# Altium PCB HandPCB.PcbDoc
Units mm, origin at the board's own origin, x right, y up, seen from the top; angles counter-clockwise.
Board outline 152.4 x 101.6 mm, 2 copper layers (Top Layer, Bottom Layer); 8 components, 21 nets, 82 pads, 4 vias.
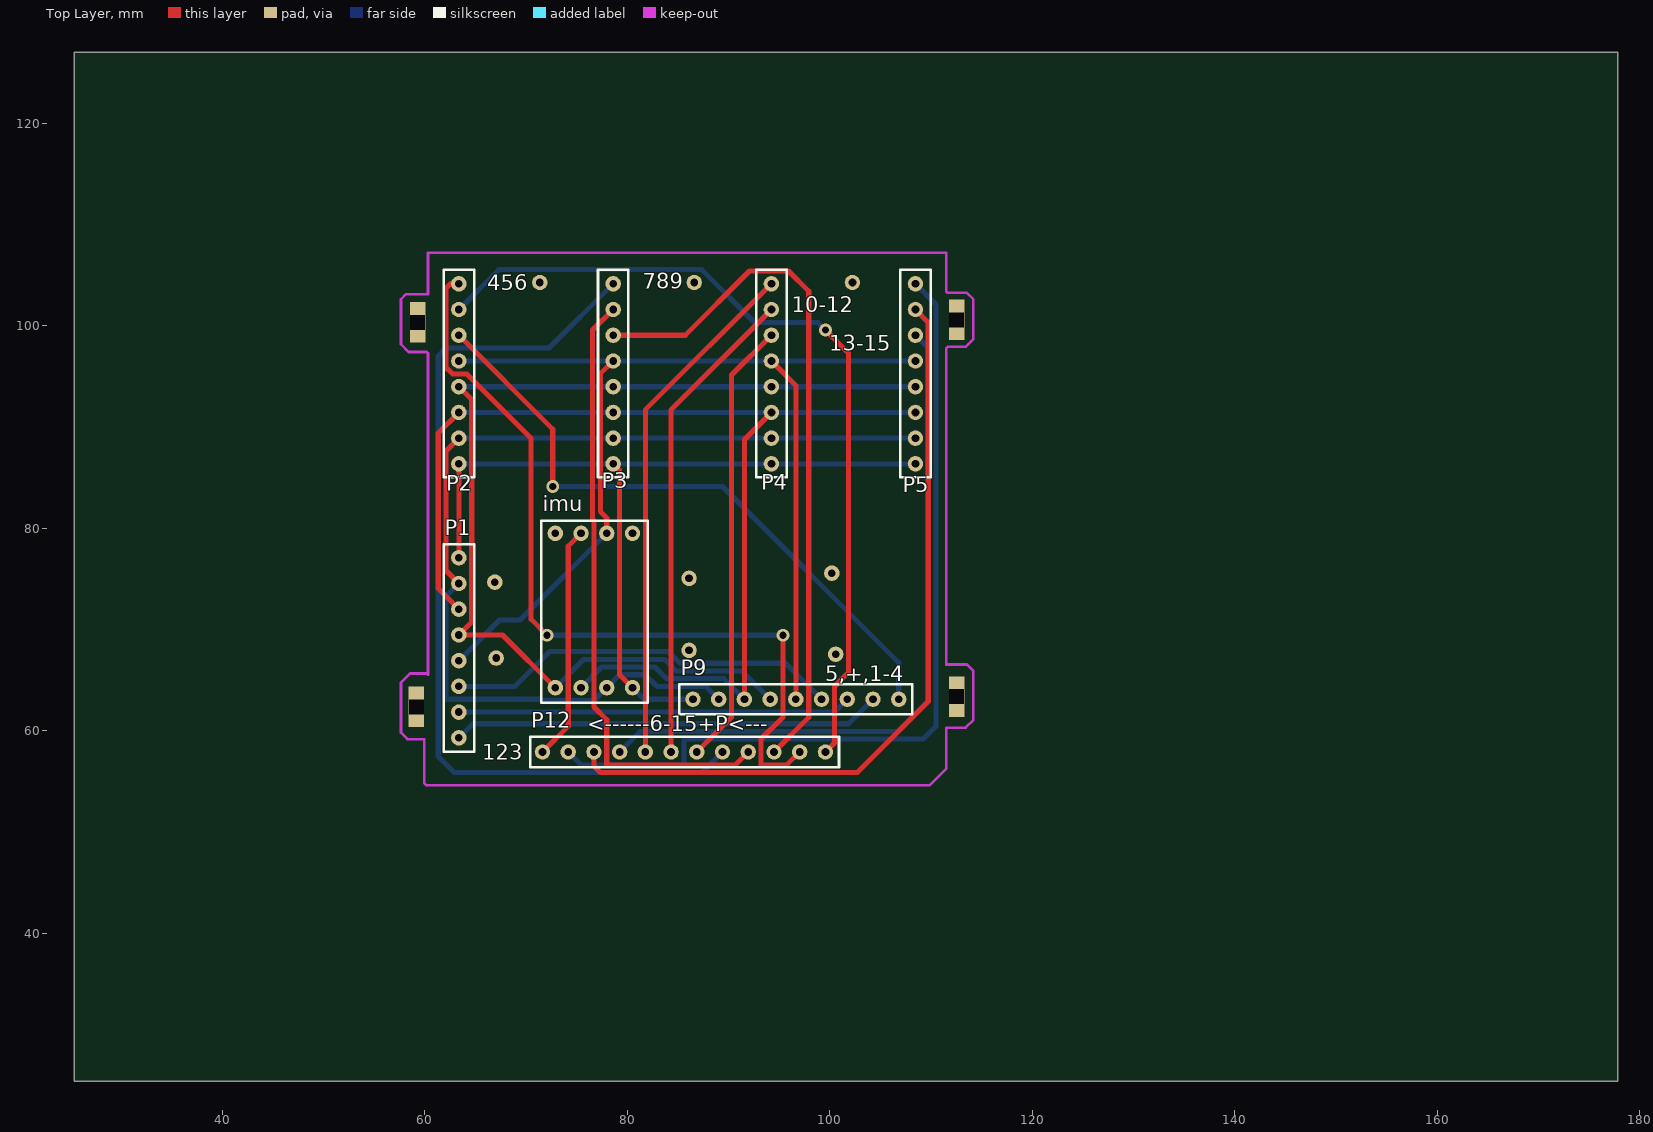
[diagram p0: Top Layer view]
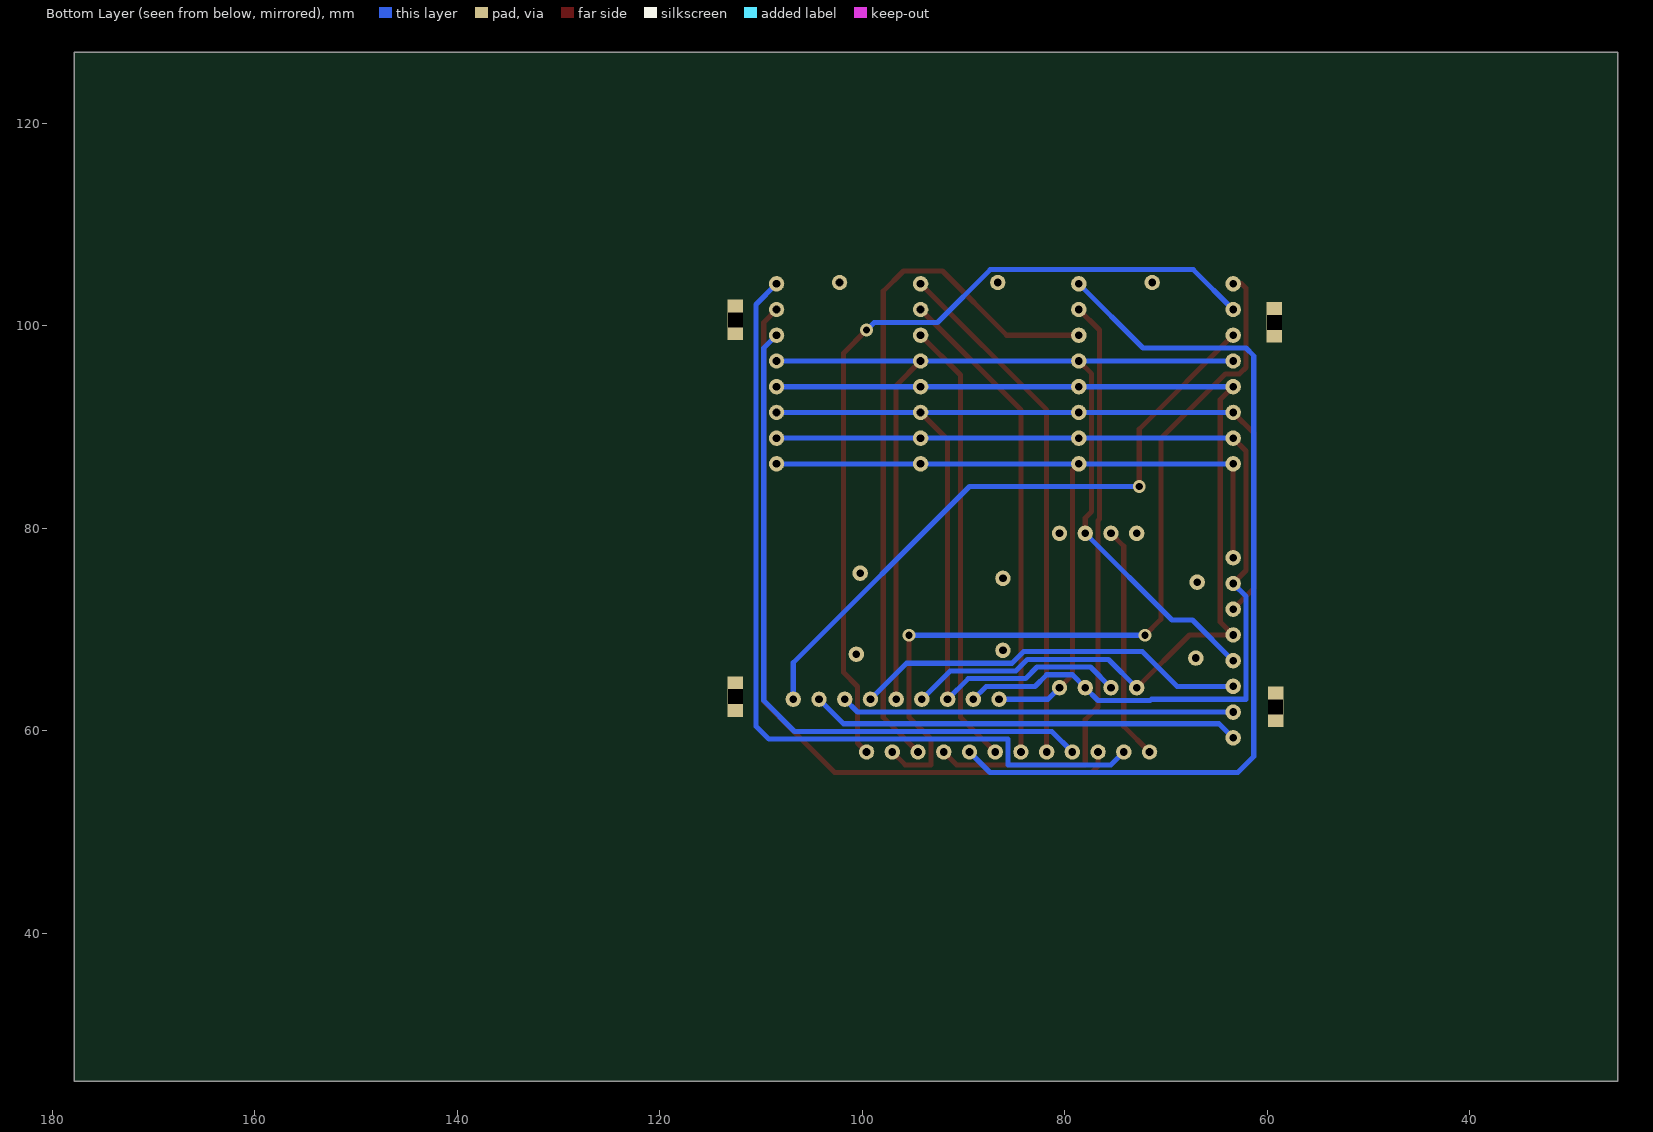
[diagram p1: Bottom Layer view, seen from below]

## Layer stack, top to bottom
Top Solder: solder mask 0.0102, Solder Resist, Dk 3.5
Top Layer: signal copper 0.0356
Dielectric 1: dielectric 0.32, FR-4, Dk 4.8
Bottom Layer: signal copper 0.0356
Bottom Solder: solder mask 0.0102, Solder Resist, Dk 3.5

## Board outline
25.4,25.4 177.8,25.4 177.8,127 25.4,127

## Design rules (kind name [scope] priority, off if disabled: settings)
Clearance [All] p1: gap=0.254 ignorepadtopadclearanceinfootprint=FALSE except(0: Arc-Hole Track-Hole SMDPad-Hole THPad-Hole Via-Hole Fill-Hole Poly-Hole Region-Hole Text-Hole)
PolygonConnect [All] p1: connectstyle=Relief reliefconductorwidth=0.254 reliefentries=4 polygonreliefangle="90 Angle" airgapwidth=0.254
RoutingVias [All] p1: holewidth=0.711 width=1.27 viastyle="Through Hole" minholewidth=0.711 minwidth=1.27 maxholewidth=0.711 maxwidth=1.27
SolderMaskExpansion [All] p1: expansion=0.102 istentingtop=FALSE
Width [All] p1: maxlimit=0.508 minlimit=0.508 preferedwidth=0.508 minimp=50.000000 maximp=50.000000 favimp=50.000000
30 further rules are at their usual default settings.

## Components (designator, comment, footprint, x,y, rotation, side; value= is the part's Value field where it differs from the comment)
imu "IMU" MPU9250 80.518,64.262 r180 top
P1 "8P" 8P 63.373,66.929 r270 top
P2 "8P" 8P 63.373,96.52 r90 top
P3 "8P" 8P 78.613,96.52 r90 top
P4 "8P" 8P 94.234,96.52 r90 top
P5 "8P" 8P 108.458,96.52 r90 top
P9 "9P" 9p 96.647,63.119 r0 top
P12 "12P" 12P 89.408,57.912 r180 top

## Footprints (in the part's own frame and the unit in brackets; to place one, negate y for a bottom-side part, rotate by r counter-clockwise, add the part's x,y. Pads: shape width x height; smd on the part's side, far side on the other; paste and mask are expansions set on the pad)
8P [mil]
  round 60 hole 30: 1(-400,0) 2(-300,0) 3(-200,0) 4(-100,0) 5(0,0) 6(100,0) 7(200,0) 8(300,0)
  silkscreen extent -453,-59 354,59
9p [mil]
  round 60 hole 30: 1(-400,0) 2(-300,0) 3(-200,0) 4(-100,0) 5(0,0) 6(100,0) 7(200,0) 8(300,0) 9(400,0)
  silkscreen extent -453,-59 453,59
12P [mil]
  round 60 hole 30: 1(-400,0) 2(-300,0) 3(-200,0) 4(-100,0) 5(0,0) 6(100,0) 7(200,0) 8(300,0) 9(400,0) 10(500,0) 11(600,0) 12(700,0)
  silkscreen extent -453,-59 748,59
MPU9250 [mil]
  round 60 hole 30: 1(0,0) 2(100,0) 3(200,0) 4(300,0) 5(0,-600) 6(100,-600) 7(200,-600) 8(300,-600)
  silkscreen extent -59,-650 354,59

## Free pads (board coordinates)
  round 1.524 hole 0.762: 2(71.374,104.267) 3(86.614,104.267) 4(102.235,104.267) 6(86.106,75.057) 7(66.929,74.676) 8(67.056,67.183) 9(100.584,67.564) 10(100.203,75.565) 11(86.106,67.945)
  rect 1.524x4 hole 1.424 square: 12(59.182,62.357) 12(59.309,100.33) 12(112.522,63.373) 12(112.522,100.584)

## Via types
v1: diameter 1.27, hole 0.711, Top Layer to Bottom Layer, 4 vias

## Nets (pads, with @x,y where several pads share a name; then routed paths per layer and width w, separated by ;. In a path a pad name is that pad's centre, name@x,y a point inside that pad or via, vN(x,y) a via of type N, cw(c..) or ccw(c..) an arc to the next point about the centre after c; other vN are vias at no path point)
Netimu_1: imu.1 P1.1 P2.1 P3.1 P4.1 P5.1 P9.1 | length 83.7
  Top Layer w0.508: P1.1 P2.1 ; P3.1 79.248,85.725 79.248,65.532 imu.1
  Bottom Layer w0.508: P2.1 P3.1 P4.1 P5.1 ; imu.1 81.661,63.119 P9.1
Netimu_2: imu.2 P1.2 P2.2 P3.2 P4.2 P5.2 P9.2 | length 101.5
  Top Layer w0.508: P1.2 62.103,75.819 62.103,87.63 P2.2
  Bottom Layer w0.508: P1.2 62.103,73.279 62.103,63.119 71.45,63.119 71.577,62.992 76.708,62.992 imu.2 79.248,65.532 81.788,65.532 82.931,64.389 87.757,64.389 P9.2 ; P2.2 P3.2 P4.2 P5.2
Netimu_3: imu.3 P1.3 P2.3 P3.3 P4.3 P5.3 P9.3 | length 113.9
  Top Layer w0.508: P1.3 61.341,74.041 61.341,89.408 P2.3 ; P9.3 91.567,88.773 P4.3
  Bottom Layer w0.508: P2.3 P3.3 P4.3 P5.3 ; imu.3 77.47,66.294 82.73,66.294 83.873,65.151 89.535,65.151 P9.3
Netimu_4: imu.4 P1.4 P2.4 P3.4 P4.4 P5.4 P9.4 | length 106.3
  Top Layer w0.508: P2.4 64.643,92.71 64.643,70.739 P1.4 67.691,69.469 imu.4
  Bottom Layer w0.508: P2.4 P3.4 P4.4 P5.4 ; imu.4 75.692,67.056 83.693,67.056 84.836,65.913 91.313,65.913 P9.4
Netimu_6: imu.6 P1.5 P2.5 P3.5 P4.5 P5.5 P9.5 | length 117.1
  Top Layer w0.508: imu.6 77.978,81.026 77.343,81.661 77.343,95.25 P3.5 ; P4.5 96.647,94.107 P9.5
  Bottom Layer w0.508: P1.5 67.386,70.942 69.418,70.942 imu.6 ; P2.5 P3.5 P4.5 P5.5
Netimu_7: imu.7 P12.12 | length 23.2
  Top Layer w0.508: P12.12 74.168,60.452 74.168,78.232 imu.7
NetP1_6: P1.6 P9.6 | length 39.2
  Bottom Layer w0.508: P1.6 68.885,64.389 72.314,67.818 84.074,67.818 85.217,66.675 95.631,66.675 P9.6
NetP1_7: P1.7 P9.7 | length 38.9
  Bottom Layer w0.508: P1.7 100.457,61.849 P9.7
NetP1_8: P1.8 P9.8 | length 42.5
  Bottom Layer w0.508: P1.8 64.77,60.706 101.854,60.706 P9.8
NetP2_6: P2.6 P9.9 | length 63.8
  Top Layer w0.508: P2.6 72.644,89.789 v1(72.644,84.125)
  Bottom Layer w0.508: v1(72.644,84.125) 89.408,84.125 106.807,66.726 P9.9
NetP2_7: P2.7 P12.1 | length 83.8
  Top Layer w0.508: P12.1 100.457,58.801 100.457,64.389 101.854,65.786 101.854,97.282 v1(99.568,99.568)
  Bottom Layer w0.508: P2.7 67.31,105.537 87.351,105.537 92.558,100.33 98.806,100.33 v1(99.568,99.568)
NetP2_8: P2.8 P12.2 | length 82
  Top Layer w0.508: P2.8 62.535,104.14 62.103,103.708 62.103,95.885 62.738,95.25 64.135,95.25 70.51,88.875 70.51,71.018 v1(72.085,69.444) ; v1(95.377,69.444) 95.377,61.341 93.218,59.182 93.218,56.642 95.758,56.642 P12.2
  Bottom Layer w0.508: v1(72.085,69.444) v1(95.377,69.444)
NetP3_6: P3.6 P12.3 | length 69.7
  Top Layer w0.508: P3.6 85.725,99.06 92.075,105.41 95.91,105.41 97.917,103.403 97.917,61.341 P12.3
NetP3_7: P3.7 P12.4 | length 60.9
  Top Layer w0.508: P3.7 76.581,99.568 76.581,80.899 76.708,80.772 76.708,62.357 77.978,61.087 77.978,56.642 90.678,56.642 P12.4
NetP3_8: P3.8 P12.5 | length 89.4
  Bottom Layer w0.508: P3.8 72.263,97.79 62.103,97.79 61.341,97.028 61.341,57.455 62.916,55.88 87.376,55.88 P12.5
NetP4_6: P4.6 P12.6 | length 44.2
  Top Layer w0.508: P12.6 90.297,61.341 90.297,95.123 P4.6
NetP4_7: P4.7 P12.7 | length 47.8
  Top Layer w0.508: P12.7 84.328,91.694 P4.7
NetP4_8: P4.8 P12.8 | length 51.4
  Top Layer w0.508: P12.8 81.788,91.694 P4.8
NetP5_6: P5.6 P12.9 | length 69.2
  Bottom Layer w0.508: P12.9 81.28,59.944 106.68,59.944 109.728,62.992 109.728,97.79 P5.6
NetP5_7: P5.7 P12.10 | length 76.8
  Top Layer w0.508: P12.10 76.708,56.515 77.343,55.88 102.718,55.88 109.728,62.89 109.728,100.33 P5.7
NetP5_8: P5.8 P12.11 | length 84.4
  Bottom Layer w0.508: P12.11 75.438,56.642 85.598,56.642 85.598,59.182 109.22,59.182 110.49,60.452 110.49,102.108 P5.8
pads on no net: imu.5 imu.8

## Keep-outs
Top Layer:
  lines w0.254: 57.658,59.817 57.658,64.77 58.547,65.659 60.198,65.659 60.325,65.532 60.325,97.282 60.198,97.409 58.42,97.409 57.658,98.171 57.658,102.616 58.166,103.124 60.325,103.124 60.325,106.934 60.325,107.188 111.506,107.188 111.506,103.378 111.633,103.251 113.538,103.251 114.173,102.616 114.173,98.679 113.411,97.917 112.966,97.917 112.078,97.917 111.633,97.917 111.506,97.79 111.506,66.548 113.538,66.548 114.173,65.913 114.173,61.087 113.411,60.325 111.506,60.325 111.506,56.261 109.855,54.61 60.198,54.61 59.944,54.864 59.944,59.182 58.293,59.182 57.658,59.817

## Silkscreen, mask and mechanical layers (free items; w line width, h text height)
Top Overlay:
  text "789" at 81.534,103.632 h1.52
  text "456" at 66.167,103.505 h1.52
  text "10-12" at 96.266,101.346 h1.52
  text "13-15" at 99.949,97.536 h1.52
  text "5,+,1-4" at 99.568,64.897 h1.52
  text "<------6-15+P<---" at 76.073,59.944 h1.52
  text "123" at 65.659,57.15 h1.52
Bottom Solder:
  lines w0.254: 25.526,122.047 25.528,121.539 ; 27.049,122.307 25.527,121.793 ; 27.053,121.291 25.527,121.793 ; 67.16,121.951 25.527,121.793 ; 84.224,122.016 125.857,122.174 ; 124.331,122.676 125.857,122.174 ; 124.335,121.66 125.857,122.174 ; 125.349,27.432 125.857,25.908 ; 125.349,120.65 125.857,122.174 ; 125.603,25.908 126.111,25.908 ; 125.603,122.174 126.111,122.174 ; 125.856,122.428 125.858,121.92 ; 125.857,66.017 125.857,25.908 ; 125.857,82.065 125.857,122.174 ; 126.365,27.432 125.857,25.908 ; 126.365,120.65 125.857,122.174
  text "100.331 (mm)" at 67.418,121.038 h1.52 r0.22
  text "96.266 (mm)" at 126.771,66.271 h1.52 r90